# EAGLE board IOIO Unrouted (EAGLE 6.3)

Size 69.52 x 57.14 mm. Coordinates in mm from the lower left corner, seen from the top.
Outline: 0,0 69.52,0 69.52,57.14 0,57.14 0,0
Copper layers (1*16): Top 0.035mm / dielectric 1.5mm / Bottom 0.035mm
Design rules "default": minimum track width 10mil, minimum drill 24mil, track to track 8mil, track to pad 8mil, pad to pad 8mil, via to via 8mil, smd to smd 8mil, copper to edge 40mil, drill to drill 8mil, minimum pad ring 10mil, minimum via ring 8mil, stop-mask expansion 4mil, vias tented up to drill 0mil, thermal gap 10mil

## Footprints (pad centres in the part's own frame; a part is rotated, then mirrored left to right if it is on the bottom)
1X03 = drill 1.016 pad 1.88: 1 0,0; 2 2.54,0; 3 5.08,0
DIL24-3 = drill 0.813 long: 1 -13.97,-3.81; 2 -11.43,-3.81; 3 -8.89,-3.81; 4 -6.35,-3.81; 5 -3.81,-3.81; 6 -1.27,-3.81; 7 1.27,-3.81; 8 3.81,-3.81; 9 6.35,-3.81; 10 8.89,-3.81; 11 11.43,-3.81; 12 13.97,-3.81; 13 13.97,3.81; 14 11.43,3.81; 15 8.89,3.81; 16 6.35,3.81; 17 3.81,3.81; 18 1.27,3.81; 19 -1.27,3.81; 20 -3.81,3.81; 21 -6.35,3.81; 22 -8.89,3.81; 23 -11.43,3.81; 24 -13.97,3.81
DIL28-6 = drill 0.813 long: 1 -16.51,-7.62; 2 -13.97,-7.62; 3 -11.43,-7.62; 4 -8.89,-7.62; 5 -6.35,-7.62; 6 -3.81,-7.62; 7 -1.27,-7.62; 8 1.27,-7.62; 9 3.81,-7.62; 10 6.35,-7.62; 11 8.89,-7.62; 12 11.43,-7.62; 13 13.97,-7.62; 14 16.51,-7.62; 15 16.51,7.62; 16 13.97,7.62; 17 11.43,7.62; 18 8.89,7.62; 19 6.35,7.62; 20 3.81,7.62; 21 1.27,7.62; 22 -1.27,7.62; 23 -3.81,7.62; 24 -6.35,7.62; 25 -8.89,7.62; 26 -11.43,7.62; 27 -13.97,7.62; 28 -16.51,7.62
MA03-1 = drill 1.016 long: 1 -2.54,0; 2 0,0; 3 2.54,0
1X20 = drill 1.016 pad 1.88 square: 1 0,0 | drill 1.016 pad 1.88: 2 2.54,0; 3 5.08,0; 4 7.62,0; 5 10.16,0; 6 12.7,0; 7 15.24,0; 8 17.78,0; 9 20.32,0; 10 22.86,0; 11 25.4,0; 12 27.94,0; 13 30.48,0; 14 33.02,0; 15 35.56,0; 16 38.1,0; 17 40.64,0; 18 43.18,0; 19 45.72,0; 20 48.26,0
1X16 = drill 1.016 pad 1.88: 1 0,0; 2 2.54,0; 3 5.08,0; 4 7.62,0; 5 10.16,0; 6 12.7,0; 7 15.24,0; 8 17.78,0; 9 20.32,0; 10 22.86,0; 11 25.4,0; 12 27.94,0; 13 30.48,0; 14 33.02,0; 15 35.56,0; 16 38.1,0
0207/7 = drill 0.813 octagon: 1 -3.81,0; 2 3.81,0
SWITCH-SPDT = drill 1.016 pad 1.88: 1 0,2.54; 2 0,0; 3 0,-2.54
S44 = drill 0.813: 1 1.27,6.35 | drill 0.813 octagon: 2 -1.27,8.89; 3 -1.27,6.35; 4 -3.81,8.89; 5 -3.81,6.35; 6 -6.35,8.89; 7 -8.89,6.35; 8 -6.35,6.35; 9 -8.89,3.81; 10 -6.35,3.81; 11 -8.89,1.27; 12 -6.35,1.27; 13 -8.89,-1.27; 14 -6.35,-1.27; 15 -8.89,-3.81; 16 -6.35,-3.81; 17 -8.89,-6.35; 18 -6.35,-8.89; 19 -6.35,-6.35; 20 -3.81,-8.89; 21 -3.81,-6.35; 22 -1.27,-8.89; 23 -1.27,-6.35; 24 1.27,-8.89; 25 1.27,-6.35; 26 3.81,-8.89; 27 3.81,-6.35; 28 6.35,-8.89; 29 8.89,-6.35; 30 6.35,-6.35; 31 8.89,-3.81; 32 6.35,-3.81; 33 8.89,-1.27; 34 6.35,-1.27; 35 8.89,1.27; 36 6.35,1.27; 37 8.89,3.81; 38 6.35,3.81; 39 8.89,6.35; 40 6.35,8.89; 41 6.35,6.35; 42 3.81,8.89; 43 3.81,6.35; 44 1.27,8.89

## Placement (x,y rotation side)
3V3  [1X03]  19.05,2.54 90 top
5V  [1X03]  13.97,2.54 90 top
AD5206BN100  [DIL24-3]  16.51,16.51 180 top
AD7506KNZ-ND  [DIL28-6]  49.53,16.51 180 top
GND  [1X03]  21.59,2.54 90 top
GND2  [1X03]  16.51,2.54 90 top
GND3  [1X03]  11.43,2.54 90 top
HIH-4030  [MA03-1]  6.35,34.29 0 top
JP2  M20  [1X20]  11.43,30.48 0 top
JP7  M16PTH  [1X16]  24.13,2.54 0 top
MQ-2  [MA03-1]  13.97,46.99 90 top
R1  10k  [0207/7]  26.67,38.1 180 top
R2  10k  [0207/7]  26.67,34.29 0 top
SWITCH  [SWITCH-SPDT]  36.83,46.99 180 top
TMP36  [MA03-1]  16.51,34.29 0 top
U$1  [S44]  54.61,44.45 0 top
VIN  [1X03]  8.89,7.62 270 top

## Library data of the parts
3V3 5V GND GND2 GND3 SWITCH VIN = SparkFun
AD5206BN100 AD7506KNZ-ND = ic-package
HIH-4030 MQ-2 TMP36 = con-lstb; OC_FARNELL: unknown; OC_NEWARK: unknown
JP2 JP7 = SparkFun-Connectors
R1 R2 = rcl
U$1 = plcc-socket

## Nets
3.3V: 3V3.1 3V3.2 3V3.3 AD5206BN100.2 AD5206BN100.6 AD5206BN100.11 AD5206BN100.17 HIH-4030.3
5V: 5V.1 5V.2 5V.3 AD7506KNZ-ND.1 AD7506KNZ-ND.18 SWITCH.2 TMP36.3
GND: AD5206BN100.4 AD7506KNZ-ND.12 GND2.1 GND2.2 GND2.3 GND3.1 GND3.2 GND3.3 GND.1 GND.2 GND.3 HIH-4030.1 JP2.1 MQ-2.1 R2.2 TMP36.1 U$1.2 U$1.4 U$1.8 U$1.13 U$1.15 U$1.17 U$1.19 U$1.24 U$1.26 U$1.28 U$1.30 U$1.35 U$1.37 U$1.39 U$1.41
MQ2OUT: MQ-2.3 R1.1
MUX1: AD7506KNZ-ND.19 U$1.1
MUX2: AD7506KNZ-ND.20 U$1.3
MUX3: AD7506KNZ-ND.21 U$1.5
MUX4: AD7506KNZ-ND.22 U$1.7
MUX5: AD7506KNZ-ND.23 U$1.12
MUX6: AD7506KNZ-ND.24 U$1.14
MUX7: AD7506KNZ-ND.25 U$1.16
MUX8: AD7506KNZ-ND.26 U$1.18
MUX9: AD7506KNZ-ND.11 U$1.23
MUX10: AD7506KNZ-ND.10 U$1.25
MUX11: AD7506KNZ-ND.9 U$1.27
MUX12: AD7506KNZ-ND.8 U$1.29
MUX13: AD7506KNZ-ND.7 U$1.34
MUX14: AD7506KNZ-ND.6 U$1.36
MUX15: AD7506KNZ-ND.5 U$1.38
MUX16: AD7506KNZ-ND.4 U$1.40
PIN1: AD7506KNZ-ND.17 JP2.2
PIN2: AD7506KNZ-ND.16 JP2.3
PIN3: AD7506KNZ-ND.15 JP2.4
PIN4: AD7506KNZ-ND.14 JP2.5
PIN5: JP2.6
PIN6: JP2.7
PIN7: JP2.8
PIN8: JP2.9
PIN9: JP2.10
PIN10: AD5206BN100.5 JP2.11
PIN11: AD5206BN100.7 JP2.12
PIN12: JP2.13
PIN13: AD5206BN100.8 JP2.14
PIN14: JP2.15
PIN15: JP2.16
PIN16: JP2.17
PIN17: JP2.18
PIN18: JP2.19
PIN19: JP2.20
PIN31: AD5206BN100.16 AD7506KNZ-ND.28 JP7.16
PIN32: JP7.15 R1.2 R2.1
PIN33: HIH-4030.2 JP7.14
PIN34: JP7.13 TMP36.2
PIN35: JP7.12
PIN36: JP7.11
PIN37: JP7.10
PIN38: JP7.9
PIN39: JP7.8
PIN40: JP7.7
PIN41: JP7.6
PIN42: JP7.5
PIN43: JP7.4
PIN44: JP7.3
PIN45: JP7.2
PIN46: JP7.1
SWITCHOFF: SWITCH.1
SWITCHON: MQ-2.2 SWITCH.3
VCC: VIN.1 VIN.2 VIN.3

## Tracks (layer width: path | path; a pad name or v marks a point on that pad's centre or on a via)
3.3V  (7 unrouted)
5V  (6 unrouted)
GND  (30 unrouted)
MQ2OUT  (1 unrouted)
MUX1  (1 unrouted)
MUX2  (1 unrouted)
MUX3  (1 unrouted)
MUX4  (1 unrouted)
MUX5  (1 unrouted)
MUX6  (1 unrouted)
MUX7  (1 unrouted)
MUX8  (1 unrouted)
MUX9  (1 unrouted)
MUX10  (1 unrouted)
MUX11  (1 unrouted)
MUX12  (1 unrouted)
MUX13  (1 unrouted)
MUX14  (1 unrouted)
MUX15  (1 unrouted)
MUX16  (1 unrouted)
PIN1  (1 unrouted)
PIN2  (1 unrouted)
PIN3  (1 unrouted)
PIN4  (1 unrouted)
PIN10  (1 unrouted)
PIN11  (1 unrouted)
PIN13  (1 unrouted)
PIN31  (2 unrouted)
PIN32  (2 unrouted)
PIN33  (1 unrouted)
PIN34  (1 unrouted)
SWITCHON  (1 unrouted)
VCC  (2 unrouted)